# EAGLE board coin (EAGLE 7.4.0)

Size 10 x 10 mm. Coordinates in mm from the lower left corner, seen from the top.
Outline: 0,0 10,0 10,10 0,10 0,0
Copper layers used: 
Design rules "default": track to track 8mil

## Footprints (pad centres in the part's own frame; a part is rotated, then mirrored left to right if it is on the bottom)
0402 = smd 0.6 x 0.6: 1 -0.5,0; 2 0.5,0
0603 = smd 0.9 x 0.9: 1 -0.8,0; 2 0.8,0

## Placement (x,y rotation side)
C1  100n  [0402]  3,3 0 top
R1  10k  [0603]  7,3 0 top
R2  1k  [0603]  5,7 0 top

## Library data of the parts
C1 R1 R2 = smd-lib